# Altium PCB FinalerPCB.PcbDoc
Units mil, origin at the board's own origin, x right, y up, seen from the top; angles counter-clockwise.
Board outline 6000 x 4000 mil, 2 copper layers (Top Layer, Bottom Layer); 17 components, 23 nets, 104 pads, 0 vias.
Unrouted connection lines stored in the file: 45.
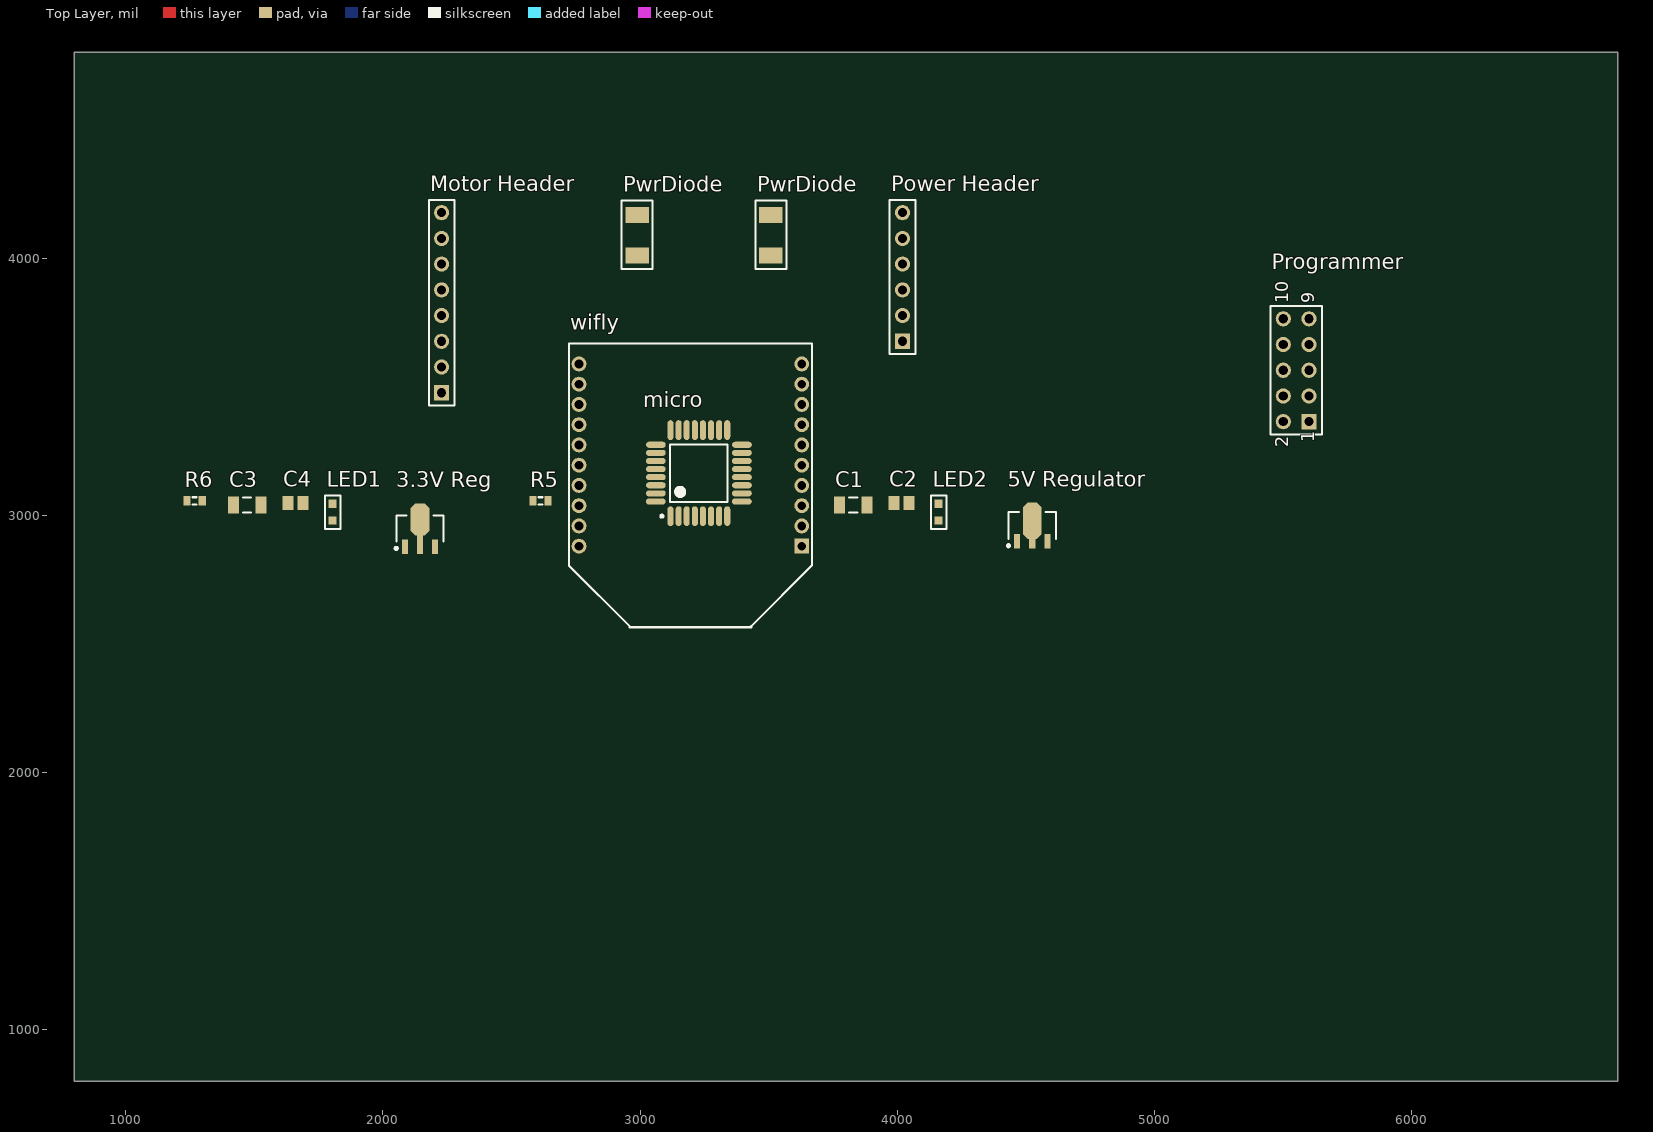
[diagram p0: Top Layer view]
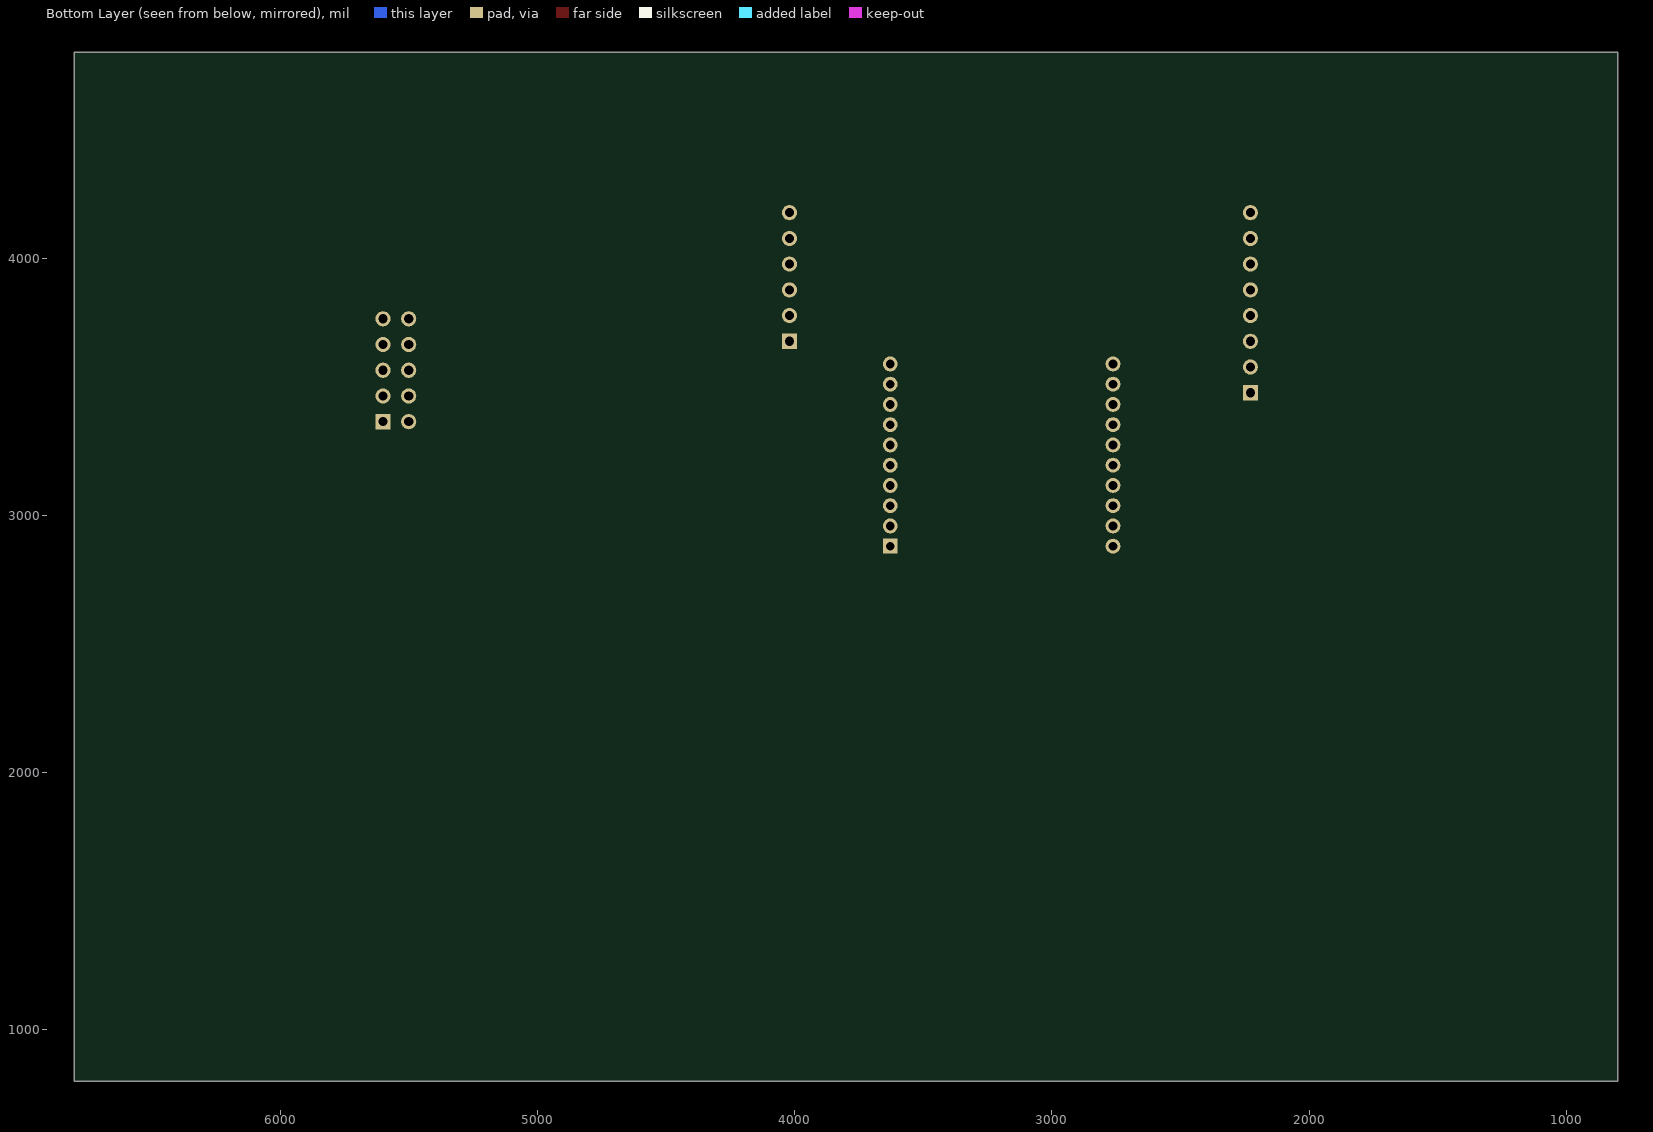
[diagram p1: Bottom Layer view, seen from below]

## Layer stack, top to bottom
Top Layer: signal copper 1.4
Dielectric: dielectric 12.6, FR-4, Dk 4.8
Bottom Layer: signal copper 1.4

## Board outline
800,800 6800,800 6800,4800 800,4800

## Design rules (kind name [scope] priority, off if disabled: settings)
AssemblyTestPointUsage AssemblyTestPointUsage_1 [All] p2:
AssemblyTestpoint AssemblyTestpoint_1 [All] p2: testpointundercomponent=TRUE minsize=40 maxsize=100 preferedsize=60 minholesize=0 maxholesize=40 preferedholesize=32 testpointgrid=1 usegrid=TRUE gridtolerance=0.01 allowsidetop=TRUE allowsidebottom=TRUE
Clearance [All] p1: gap=8
ComponentClearance ComponentClearance_1 [All] p2: gap=10 collisioncheckmode=3 verticalgap=10 showdistances=FALSE
DiffPairsRouting DiffPairsRouting_1 [All] p2: maxlimit=10 minlimit=10 mostfreqgap=10 maxuncoupledlength=500
FabricationTestPointUsage TestPointUsage [All] p2: valid=0 allowmultiple=FALSE
FabricationTestpoint Testpoint [All] p2: side=3 testpointundercomponent=TRUE minsize=40 maxsize=100 preferedsize=60 minholesize=0 maxholesize=40 preferedholesize=32 testpointgrid=1 allowsidetop=TRUE allowsidebottom=TRUE usegrid=TRUE gridtolerance=0.01
FanoutControl Fanout_LCC [IsLCC] p1: bgadir=Out bgaviamode=Centered fanoutstyle=Auto fanoutdirection=Alternating viagrid=1 // Fanout_LCC (Default Rule)
FanoutControl Fanout_BGA [IsBGA] p2: bgadir=Out bgaviamode=Centered fanoutstyle=Auto fanoutdirection=Alternating viagrid=1 // Fanout_BGA (Default Rule)
FanoutControl Fanout_Small [(CompPinCount < 5)] p3: bgadir=Out bgaviamode=Centered fanoutstyle=Auto fanoutdirection=OutThenIn viagrid=1 // Fanout_Small (Default Rule)
FanoutControl Fanout_SOIC [IsSOIC] p4: bgadir=Out bgaviamode=Centered fanoutstyle=Auto fanoutdirection=Alternating viagrid=1 // Fanout_SOIC (Default Rule)
FanoutControl Fanout_BGA_1 [IsBGA] p6: bgadir=Out bgaviamode=Centered fanoutstyle=Auto fanoutdirection=Alternating viagrid=1 // Fanout_BGA (Default Rule)
FanoutControl Fanout_LCC_1 [IsLCC] p7: bgadir=Out bgaviamode=Centered fanoutstyle=Auto fanoutdirection=Alternating viagrid=1 // Fanout_LCC (Default Rule)
FanoutControl Fanout_SOIC_1 [IsSOIC] p8: bgadir=Out bgaviamode=Centered fanoutstyle=Auto fanoutdirection=Alternating viagrid=1 // Fanout_SOIC (Default Rule)
FanoutControl Fanout_Small_1 [(CompPinCount < 5)] p9: bgadir=Out bgaviamode=Centered fanoutstyle=Auto fanoutdirection=OutThenIn viagrid=1 // Fanout_Small (Default Rule)
FanoutControl Fanout_Default_1 [All] p10: bgadir=Out bgaviamode=Centered fanoutstyle=Auto fanoutdirection=Alternating viagrid=1 // Fanout_Default (Default Rule)
Height Height_1 [All] p2: minheight=0 maxheight=1000 prefheight=500
HoleSize HoleSize_1 [All] p2: absolutevalues=TRUE maxlimit=100 minlimit=1 maxpercent=80.000 minpercent=20.000
HoleToHoleClearance HoleToHoleClearance_1 [All] p2: gap=10 allowstackedmicrovias=TRUE
LayerPairs LayerPairs_1 [All] p2: enforce=TRUE
MinimumSolderMaskSliver MinimumSolderMaskSliver_1 [All] p2: minsoldermaskwidth=10
NetAntennae NetAntennae_1 [All] p2: netantennaetolerance=0
PasteMaskExpansion PasteMaskExpansion_1 [All] p2: expansion=0
PlaneClearance PlaneClearance_1 [All] p2: clearance=20
PolygonConnect [All] p1: connectstyle=Relief reliefconductorwidth=10 reliefentries=4 polygonreliefangle="90 Angle"
PolygonConnect PolygonConnect_1 [All] p2: connectstyle=Relief reliefconductorwidth=10 reliefentries=4 polygonreliefangle="90 Angle"
RoutingPriority RoutingPriority_1 [All] p2: routingpriority=0
RoutingTopology RoutingTopology_1 [All] p2: topology=Shortest
RoutingVias [All] p1: holewidth=25 width=40 viastyle="Through Hole" minholewidth=28 minwidth=50 maxholewidth=28 maxwidth=50
ShortCircuit ShortCircuit_1 [All] p2: allowed=FALSE
SilkToSilkClearance SilkToSilkClearance_1 [All] p2: silktosilkclearance=10
SilkscreenOverComponentPads [All] p1: minsilkscreentomaskgap=10
SilkscreenOverComponentPads SilkscreenOverComponentPads_1 [All] p2: minsilkscreentomaskgap=10
SolderMaskExpansion [All] p1: expansion=4
SolderMaskExpansion SolderMaskExpansion_1 [All] p2: expansion=4
UnRoutedNet UnRoutedNet_1 [All] p2:
Width [All] p1: maxlimit=10 minlimit=10 preferedwidth=10
23 further rules are at their usual default settings.

## Components (designator, comment, footprint, x,y, rotation, side; value= is the part's Value field where it differs from the comment)
"3.3V Reg" "TO-220 3.3 V Regulator" SOT89-150P410X160-3N 2144,2948.48 r90 top
"5V Regulator" "5v Regulator" SOT89-150P360X170-3N 4524,2960.48 r90 top
C1 "Cap" C1206 3828,3040.48 r0 top
C2 "Cap" C0805 4016,3048.48 r0 top
C3 "Cap" C1206 1472,3040.48 r0 top
C4 "Cap" C0805 1660,3048.48 r0 top
LED1 "LED" LEDFixed 1804,3012.48 r90 top
LED2 "LED" LEDFixed 4160,3012.48 r90 top
micro "ATmega328-AU" 32A_M 3228,3164 r90 top
"Motor Header" "Header 8" HDR1X8 2228,3476.48 r90 top
"Power Header" "Header 6" HDR1X6 4020,3676.48 r90 top
Programmer "Header 5X2" HDR2X5 5600,3364 r90 top
PwrDiode "DIODE" Diode 3508,4088.48 r90 top
PwrDiode "DIODE" Diode 2988,4088.48 r90 top
R5 "Res3" J1-0603 2612,3056.48 r0 top
R6 "Res3" J1-0603 1268,3056.48 r0 top
wifly "RN-XV" XBEE 3628,2880 r90 top

## Footprints (in the part's own frame and the unit in brackets; to place one, negate y for a bottom-side part, rotate by r counter-clockwise, add the part's x,y. Pads: shape width x height; smd on the part's side, far side on the other; paste and mask are expansions set on the pad)
32A_M [mm] "32-Pin Thin Quad Flat Pack 0.8 mm Pitch, IPC Low Density"
  oval 1.95x0.6 smd: 1(-4.25,2.8) 2(-4.25,2) 3(-4.25,1.2) 4(-4.25,0.4) 5(-4.25,-0.4) 6(-4.25,-1.2) 7(-4.25,-2) 8(-4.25,-2.8) 17(4.25,-2.8) 18(4.25,-2) 19(4.25,-1.2) 20(4.25,-0.4) 21(4.25,0.4) 22(4.25,1.2) 23(4.25,2) 24(4.25,2.8)
  oval 0.6x1.95 smd: 9(-2.8,-4.25) 10(-2,-4.25) 11(-1.2,-4.25) 12(-0.4,-4.25) 13(0.4,-4.25) 14(1.2,-4.25) 15(2,-4.25) 16(2.8,-4.25) 25(2.8,4.25) 26(2,4.25) 27(1.2,4.25) 28(0.4,4.25) 29(-0.4,4.25) 30(-1.2,4.25) 31(-2,4.25) 32(-2.8,4.25)
  silkscreen extent -4.37,-2.85 2.85,3.77, body extent -3.5,-3.5 3.5,3.5, height 1.2
C0805 [mm] "Chip Capacitor, Body 2.0x1.3mm, IPC High Density"
  rect 1.1x1.4 smd: 1(-0.75,0) 2(0.75,0)
  body extent -1.1,-0.72 1.1,0.72, height 1.4
C1206 [mm] "Chip Capacitor, Body 3.2x1.6mm, IPC High Density"
  rect 1.1x1.7 smd: 1(-1.35,0) 2(1.35,0)
  silkscreen extent -0.4,-0.75 0.4,0.75, body extent -1.7,-0.9 1.7,0.9, height 1.3
Diode [mm]
  rect 1.57x2.3 smd: A(-2.01,0) K(2.01,0)
  silkscreen extent -3.3,-1.52 3.43,1.52
HDR1X6 [mm] "Connector; Header; 6 Position"
  rect 1.5x1.5 hole 0.9: 1(0,0)
  round 1.5 hole 0.9: 2(2.54,0) 3(5.08,0) 4(7.62,0) 5(10.16,0) 6(12.7,0)
  silkscreen extent -1.27,-1.27 13.97,1.27
HDR1X8 [mm] "Connector; Header; 8 Position"
  rect 1.5x1.5 hole 0.9: 1(0,0)
  round 1.5 hole 0.9: 2(2.54,0) 3(5.08,0) 4(7.62,0) 5(10.16,0) 6(12.7,0) 7(15.24,0) 8(17.78,0)
  silkscreen extent -1.27,-1.27 19.05,1.27
HDR2X5 [mm] "Connector; Header; 5x2 Position"
  rect 1.5x1.5 hole 0.9: 1(0,0)
  round 1.5 hole 0.9: 2(0,2.54) 3(2.54,0) 4(2.54,2.54) 5(5.08,0) 6(5.08,2.54) 7(7.62,0) 8(7.62,2.54) 9(10.16,0) 10(10.16,2.54)
  silkscreen extent -1.27,-1.27 11.43,3.81
J1-0603 [mm] "Chip Resistor, Body 1.6x0.8mm, IPC High Density"
  rect 0.7x0.9 smd: 1(-0.75,0) 2(0.75,0)
  silkscreen extent -0.2,-0.35 0.2,0.35, body extent -0.85,-0.48 0.85,0.48, height 0.9
LEDFixed [mm]
  rect 0.8x0.8 smd: A(-0.825,0) K(0.825,0)
  silkscreen extent -1.65,-0.76 1.65,0.76
SOT89-150P360X170-3N [mm] "SOT89, 3-Leads, Body 4.5x2.5mm (max), Pitch 1.50mm, Lead Span 3.6mm, IPC Medium Density"
  rect 1.4x0.6 smd: 1(-1.55,1.5) 3(-1.55,-1.5)
  rect 0.9x0.6 smd: 2(-1.8,0)
  oct 3.6x1.8 smd: 2(0.45,0)
  silkscreen extent -2.12,-2.35 1.35,2.47, body extent -1.35,-2.35 1.35,2.35, height 1.7
SOT89-150P410X160-3N [mm] "SOT89, 3-Leads, Body 4.5x2.4mm (max), Pitch 1.50mm, Lead Span 4.1mm, IPC Medium Density"
  rect 1.4x0.6 smd: 1(-1.8,1.5) 3(-1.8,-1.5)
  rect 1.8x0.6 smd: 2(-1.6,0)
  oct 3.2x1.9 smd: 2(0.9,0)
  silkscreen extent -2.07,-2.3 1.3,2.47, body extent -1.3,-2.3 1.3,2.3, height 1.6
XBEE [mil]
  rect 58x58 hole 34: 1(0,0)
  round 58 hole 34: 2(78.73,0) 3(157.47,0) 4(236.2,0) 5(314.93,0) 6(393.67,0) 7(472.4,0) 8(551.13,0) 9(629.87,0) 10(708.6,0) 11(708.6,866.07) 12(629.87,866.07) 13(551.13,866.07) 14(472.4,866.07) 15(393.67,866.07) 16(314.93,866.07) 17(236.2,866.07) 18(157.47,866.07) 19(78.73,866.07) 20(0,866.07)
  silkscreen extent -315,-39 787,905

## Part data
C1 C2 C3 C4: "Capacitor"
micro: "8-bit AVR Microcontroller, 32KB Flash, 1KB EEPROM, 2KB SRAM, 32-pin TQFP, Industrial Grade (-40°C to 85°C)"
"Motor Header": "Header, 8-Pin"
"Power Header": "Header, 6-Pin"
Programmer: "Header, 5-Pin, Dual row"
R5 R6: "Resistor"

## Nets (pads, with @x,y where several pads share a name; then routed paths per layer and width w, separated by ;. In a path a pad name is that pad's centre, name@x,y a point inside that pad or via, vN(x,y) a via of type N, cw(c..) or ccw(c..) an arc to the next point about the centre after c; other vN are vias at no path point)
+3.3V: "3.3V Reg.1" C4.2 LED1.A wifly.1
+5V: "5V Regulator.1" C2.2 LED2.A micro.4 micro.6 micro.18 Programmer.2
+6V: "3.3V Reg.3" "5V Regulator.3" C1.2 C3.2 PwrDiode.K@3508,4167.61
GND: "3.3V Reg.2" "5V Regulator.2" "Motor Header.4" "Motor Header.6" "Power Header.2" C1.1 C2.1 C3.1 C4.1 micro.3 micro.5 micro.19 micro.21 micro.22 Programmer.4 Programmer.6 Programmer.8 Programmer.10 R5.2 R6.2 wifly.10
MC-BOTTOM: micro.9
MC-TAIL-1: micro.13
MC-TAIL-2: micro.14
MC-TOP: micro.10
MD-BOTTOM: "Motor Header.5"
MD-TAIL-1: "Motor Header.7"
MD-TAIL-2: "Motor Header.8"
MD-TOP: "Motor Header.3"
MISO: micro.16 Programmer.9
MOSI: micro.15 Programmer.1
NetLED1_K: LED1.K R6.1
NetLED2_K: LED2.K R5.1
RESET: micro.29 Programmer.5
RX: "Motor Header.2" micro.1
RX_ATM: micro.30 wifly.2
SCK: micro.17 Programmer.7
TX: "Motor Header.1" micro.32
TX_ATM: micro.31 wifly.3
VIN: "Power Header.1" PwrDiode.A@3508,4009.35
pads on no net: "Power Header.3" "Power Header.4" "Power Header.5" "Power Header.6" micro.2 micro.7 micro.8 micro.11 micro.12 micro.20 micro.23 micro.24 micro.25 micro.26 micro.27 micro.28 Programmer.3 PwrDiode.A@2988,4009.35 PwrDiode.K@2988,4167.61 wifly.4 wifly.5 wifly.6 wifly.7 wifly.8 wifly.9 wifly.11 wifly.12 wifly.13 wifly.14 wifly.15 wifly.16 wifly.17 wifly.18 wifly.19 wifly.20

## Silkscreen, mask and mechanical layers (free items; w line width, h text height)
Mechanical 16:
  drawing of 1874 lines, arcs and shapes, not listed
  text "1" at 1172.34,7365 h70
  text "2" at 3530.35,7365 h70
  text "3" at 5907,7365 h70
  text "4" at 8282.35,7365 h70
  text "A" at 75,6475 h70
  text "A" at 9370,6475 h70
  text "B" at 75,4599 h70
  text "B" at 9370,4599 h70
  text "C" at 75,2723 h70
  text "C" at 9370,2723 h70
  text "ENGINEER:" at 4850,1300 h45
  text "TITLE:" at 6350,1300 h45
  text "PCB DESIGNER:" at 4850,1005 h45
  text "D" at 75,851 h70
  text "D" at 9370,851 h70
  text "DATE:" at 4850,700 h45
  text "PART NO.:" at 6350,700 h45
  text "REV:" at 8450,700 h45
  text "Altium Limited" at 3550,600 h70
  text ".PRINT_DATE" at 4900,580 h70
  text "12a Rodborough Rd" at 3550,500 h70
  text "Frenchs Forest" at 3550,400 h70
  text "FILE NAME:" at 4850,400 h45
  text "DWG NO:" at 6350,400 h45
  text "SCALE:" at 8450,400 h45
  text "NSW 2086" at 3550,300 h70
  text ".PCB_FILE_NAME_NO_PATH" at 4900,280 h70
  text "1" at 1172.34,65 h70
  text "2" at 3530.35,65 h70
  text "3" at 5907,65 h70
  text "4" at 8282.35,65 h70

## Text inside footprints (layer, text, board x,y; h text height)
Programmer: Top Overlay "10" at 5520,3824 h50 r90; Top Overlay "9" at 5620,3824 h50 r90; Top Overlay "1" at 5620,3284 h50 r90; Top Overlay "2" at 5520,3264 h50 r90